# Altium PCB P00160.5.28_P.PcbDoc
Units mm, origin at the board's own origin, x right, y up, seen from the top; angles counter-clockwise.
Board outline 67 x 20.5 mm, 4 copper layers (Top Layer, MID1, MID2, Bottom Layer), stack 0.982 mm thick; 78 components, 49 nets, 312 pads, 209 vias.
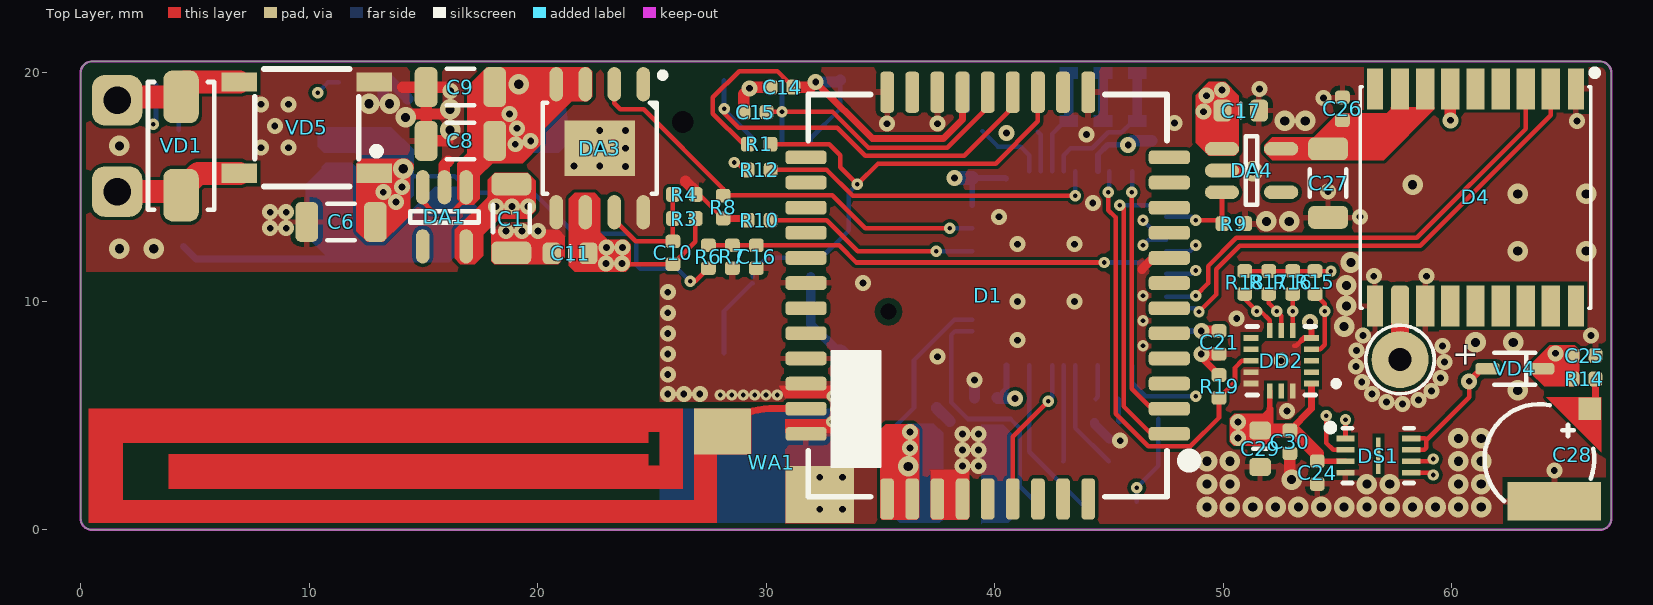
[diagram p0: Top Layer view]
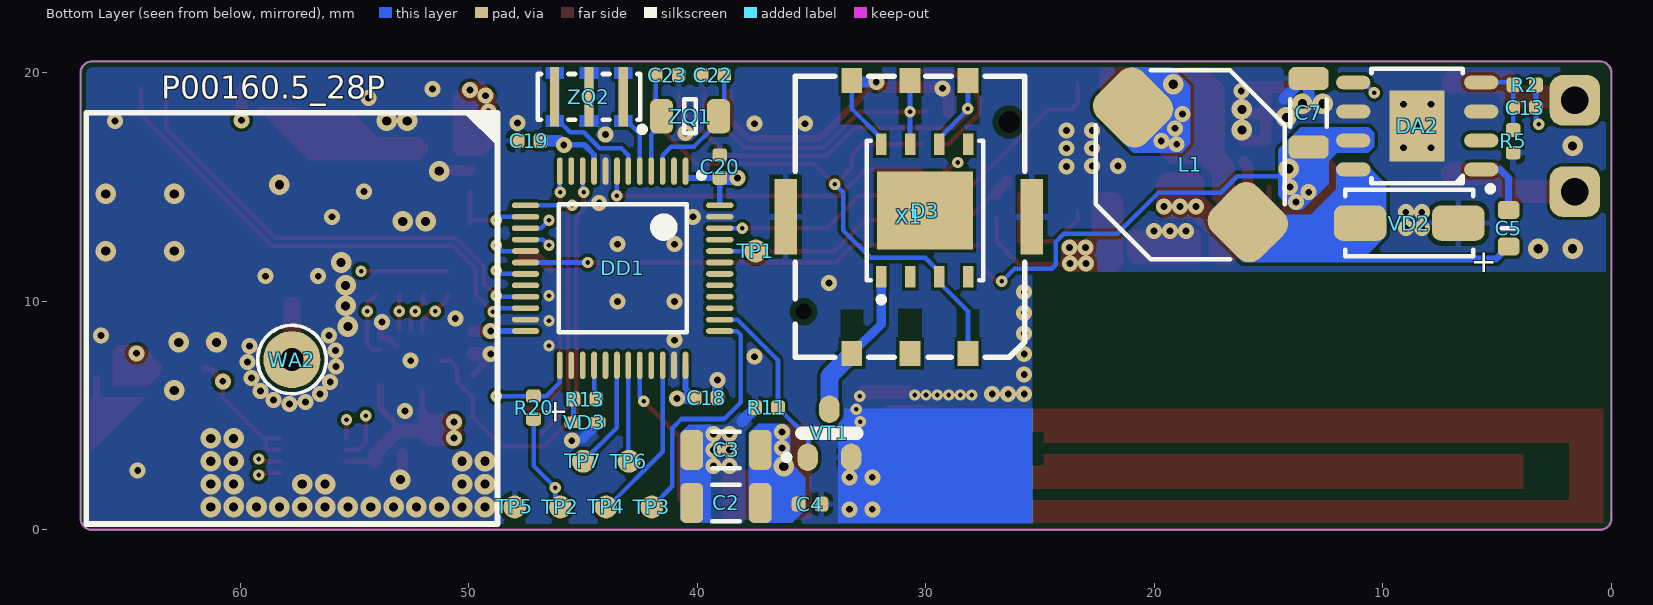
[diagram p1: Bottom Layer view, seen from below]
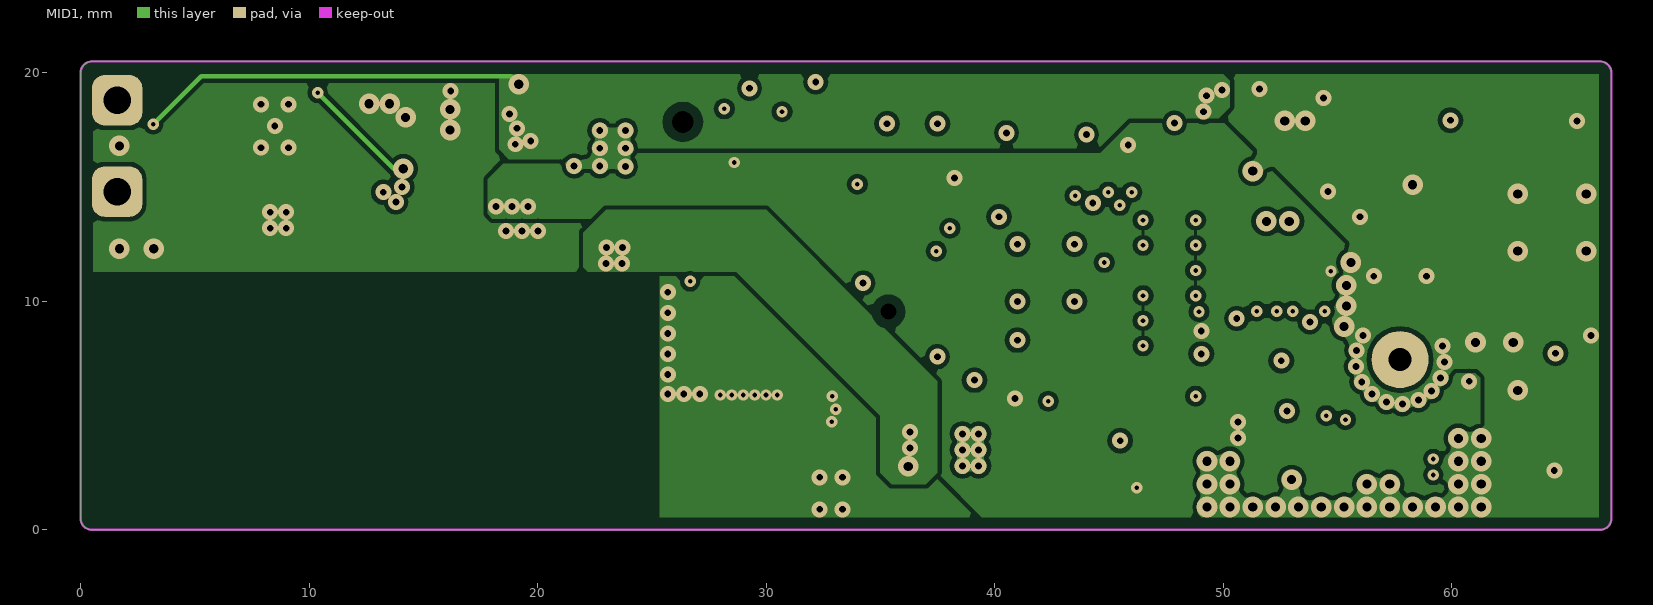
[diagram p2: MID1]
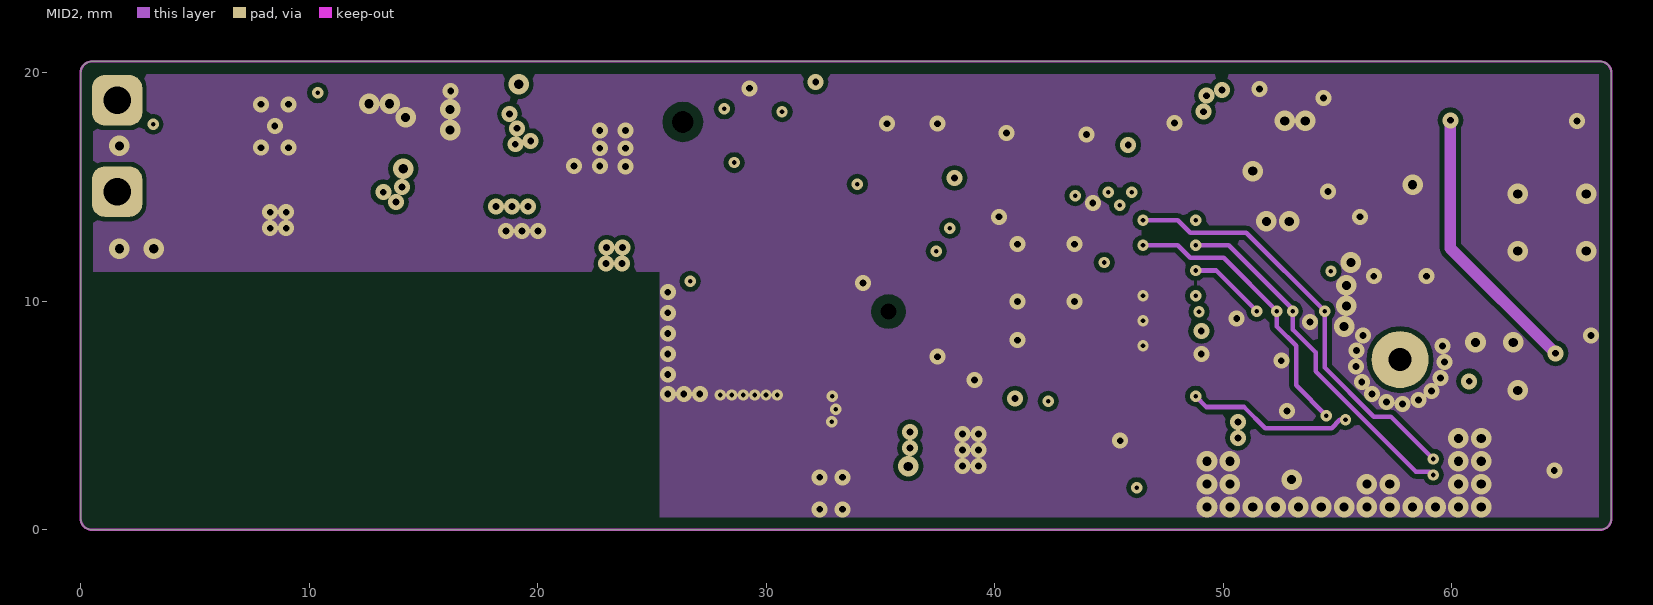
[diagram p3: MID2]
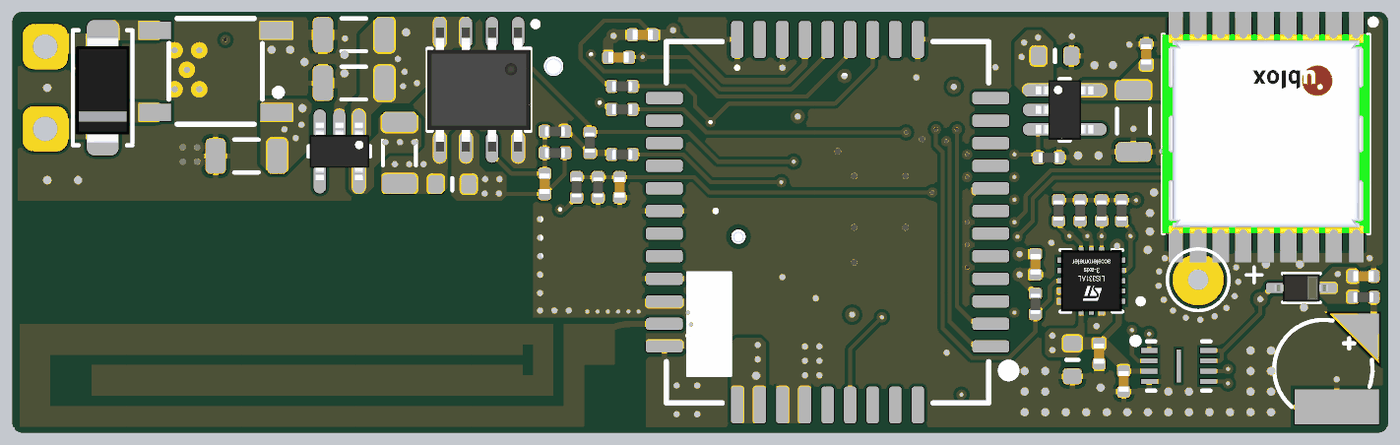
[diagram p4: 3D render of the assembled board from above, using the file's embedded part models]
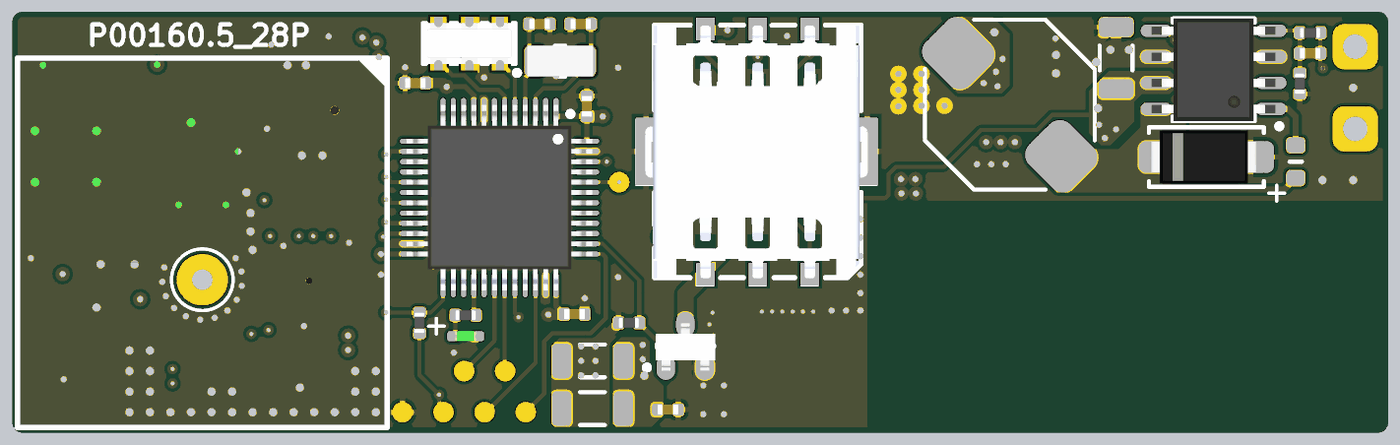
[diagram p5: 3D render of the assembled board from below, using the file's embedded part models]

## Layer stack, top to bottom
Top Solder: solder mask 0.02, Solder Resist, Dk 3.5
Top Layer: signal copper 0.018
Dielectric 1: prepreg 0.2, Prepreg 7628, Dk 4.6
MID1: signal copper 0.018
Dielectric 3: core 0.51, Dk 4.2
MID2: signal copper 0.018
Dielectric 2: prepreg 0.2, Prepreg 7628, Dk 4.2
Bottom Layer: signal copper 0.018
Bottom Solder: solder mask 0.02, Solder Resist, Dk 3.5

## Board outline
0,0.5 ccw(c0.5,0.5) 0.5,0 66.5,0 ccw(c66.5,0.5) 67,0.5 67,20 ccw(c66.5,20) 66.5,20.5 0.5,20.5 ccw(c0.5,20) 0,20

## Design rules (kind name [scope] priority, off if disabled: settings)
Clearance NonPlated_MID [(ObjectKind = 'Pad') And (Net = 'No Net') vs IsElectrical  And OnMid] p1: gap=0.4
Clearance Non_plated [(ObjectKind = 'Pad') And (Net = 'No Net')  And HasRoundHole vs IsElectrical  And (OnTOP Or OnBottom)] p2: gap=0.25
Clearance KeepOut_MID [(IsKeepOut And (Layer = 'KeepOutLayer')) vs (IsElectrical and OnMid) or IsVia] p3: gap=0.5
Clearance KeepOut [IsKeepOut] p4: gap=0.2
Clearance Top&Bot [OnTop Or OnBottom] p5: gap=0.15
Clearance All [All] p6: gap=0.2
ComponentClearance [All] p1 off: gap=0.1 collisioncheckmode=3 verticalgap=0.1 showdistances=FALSE
PlaneConnect [All] p1: planeconnectstyle=Direct reliefexpansion=0.508 reliefentries=4 reliefconductorwidth=0.254 reliefairgap=0.254
PolygonConnect Direct [(Component = 'DD1') Or (Component = 'DA2') Or (Component = 'VD5')   Or (Component = 'DA3')Or (Component = 'WA1')   Or (Component = 'DD2')] p1: connectstyle=Direct reliefconductorwidth=0.254 reliefentries=4 polygonreliefangle="90 Angle" airgapwidth=0.254
PolygonConnect GND_VIAS [InNet('GND') or InNet('4V0') or InNet('3V3MCU')  or InNet('4V5') vs IsVia] p2: connectstyle=Direct reliefconductorwidth=0.254 reliefentries=4 polygonreliefangle="90 Angle" airgapwidth=0.254
PolygonConnect [All] p3: connectstyle=Relief reliefconductorwidth=0.25 reliefentries=4 polygonreliefangle="90 Angle" airgapwidth=0.2
RoutingVias [All] p1: holewidth=0.3 width=0.3 viastyle="Through Hole" minholewidth=0.2 minwidth=0.5 maxholewidth=1 maxwidth=2
SolderMaskExpansion [All] p1: expansion=0.05
Width RF [InNetClass('RF')] p1 off: maxlimit=1.091 minlimit=0.254 preferedwidth=1.091 toplayer_minwidth=0.283 toplayer_maxwidth=0.283 toplayer_prefwidth=0.283 midlayer1_minwidth=0.758 midlayer1_maxwidth=0.758 midlayer1_prefwidth=0.758 midlayer2_maxwidth=0.254 midlayer2_prefwidth=0.254 bottomlayer_minwidth=1.091 impedancedriven=TRUE minimp=50.000000 maximp=50.000000 favimp=50.000000
Width All_Width [All] p2: maxlimit=2 minlimit=0.15 preferedwidth=0.2 minimp=50.000000 maximp=50.000000 favimp=50.000000
28 further rules are at their usual default settings.

## Classes and differential pairs
net class RF: GPS_ANT GSM_ANT

## Components (designator, comment, footprint, x,y, rotation, side; value= is the part's Value field where it differs from the comment)
C1 "чип 1206 100uF/6.3V," CAPC3216X135(1206) 18.85,13.625 r270 top
C2 "чип 1206 100uF/6.3V," CAPC3216X135(1206) 38.75,1.175 r0 bottom
C3 "чип 1206 100uF/6.3V," CAPC3216X135(1206) 38.75,3.5 r0 bottom
C4 "чип 0402 0.1uF/10V," CAPC1005X50(0402) 35.075,1.125 r0 bottom
C5 "чип 0603 0.1uF/50V," CAPC1608X50(0603) 4.5,13.2 r90 bottom
C6 "чип 1206 10uF/50V," CAPC3216X135(1206) 11.4,13.475 r180 top
C7 "чип 1206 10uF/50V," CAPC3216X135(1206) 13.25,18.25 r90 bottom
C8 "чип 1206 100uF/6.3V," CAPC3216X135(1206) 16.625,17.025 r180 top
C9 "чип 1206 100uF/6.3V," CAPC3216X135(1206) 16.625,19.375 r180 top
C10 "чип 0402 */," CAPC1005X50(0402) 25.925,12.125 r90 top
C11 "чип 0603 10uF/6.3V," CAPC1608X50(0603) 21.425,12.1 r0 top
C13 "чип 0402 150pF/50V," CAPC1005X50(0402) 3.8,18.475 r0 bottom
C14 "чип 0402 0.1uF/10V," CAPC1005X50(0402) 30.7,19.375 r0 top
C15 "чип 0402 10nF/10V," CAPC1005X50(0402) 29.525,18.275 r0 top
C16 "чип 0402 0.1uF/10V," CAPC1005X50(0402) 29.575,11.95 r90 top
C17 "чип 0603 10uF/6.3V," CAPC1608X50(0603) 50.775,18.35 r180 top
C18 "чип 0402 0.1uF/10V," CAPC1005X50(0402) 39.625,5.775 r0 bottom
C19 "чип 0402 0.1uF/10V," CAPC1005X50(0402) 47.375,17.025 r180 bottom
C20 "чип 0402 0.1uF/10V," CAPC1005X50(0402) 39.025,15.9 r270 bottom
C21 "чип 0402 0.1uF/10V," CAPC1005X50(0402) 49.825,8.2 r90 top
C22 "чип 0402 10pF/10V," CAPC1005X50(0402) 39.325,19.9 r0 bottom
C23 "чип 0402 10pF/10V," CAPC1005X50(0402) 41.325,19.9 r180 bottom
C24 "чип 0402 0.1uF/10V," CAPC1005X50(0402) 54.125,2.5 r90 top
C25 "чип 0402 0.1uF/10V," CAPC1005X50(0402) 65.8,7.625 r180 top
C26 "чип 0402 0.1uF/10V," CAPC1005X50(0402) 55.225,18.425 r270 top
C27 "чип 1206 100uF/6.3V," CAPC3216X135(1206) 54.6,15.175 r270 top
C28 "Coin 80mF/3.3В" XH414HG-IV01E 63.85,3.1 r0 top
C29 "чип 0603 10uF/6.3V," CAPC1608X50(0603) 51.625,3.55 r90 top
C30 "чип 0402 0.1uF/10V," CAPC1005X50(0402) 52.925,3.85 r90 top
D1 "SIM800C" SIMCOM800C 39.7,10.25 r180 top locked
D3 "SIMCHIP" VQFN127P600-8N 30.05,13.975 r90 bottom locked
D4 "MAX-M8C" MAX-7 61.05,14.55 r270 top locked
DA1 "TPS76333DBV(SOT23-5)" SOT95P285X130-5N(SOT23-5) 15.925,13.7 r270 top
DA2 "ST1S14PHR(HSOP-8)" HSOP127P-8N 8.5,17.675 r0 bottom
DA3 "RT9025-18GSP(HSOP-8)" HSOP127P-8N 22.725,16.7 r270 top
DA4 "TPS76333DBV(SOT23-5)" SOT95P285X130-5N(SOT23-5) 51.25,15.725 r0 top
DD1 "STM32L151CBT6(LQFP-48)" TSQFP50P900X900X160-48N 43.275,11.45 r270 bottom locked
DD2 "LIS331DLH(LGA-16 (3x5x1))" LGA16S50P3X5_300X300X100 52.55,7.4 r180 top
DS1 "MX25L1006EZUI-10G(USON-8)" SON50P300X60_HS-9N 56.8,3.25 r0 top locked
L1 "CDRH8D28NP-100NC(10uH)" CDRH8D28NP 18.425,15.975 r45 bottom locked
R1 "чип 0402 4.75k 1%" RESC1005X35(0402) 29.7,16.875 r0 top
R2 "чип 0402 6.8k 1%" RESC1005X35(0402) 3.8,19.475 r180 bottom
R3 "чип 0402 19.1k 1%" RESC1005X35(0402) 26.425,13.625 r0 top
R4 "чип 0402 4.75k 1%" RESC1005X35(0402) 26.425,14.675 r0 top
R5 "чип 0402 2.49k 1%" RESC1005X35(0402) 4.3,17 r270 bottom
R6 "чип 0402 102k 1%" RESC1005X35(0402) 27.475,11.95 r90 top
R7 "чип 0402 6.8k 1%" RESC1005X35(0402) 28.525,11.95 r270 top
R8 "чип 0402 102k 1%" RESC1005X35(0402) 28.125,14.125 r90 top
R9 "чип 0402 102k 1%" RESC1005X35(0402) 50.475,13.4 r0 top
R10 "чип 0402 10k 5%" RESC1005X35(0402) 29.7,13.55 r0 top
R11 "чип 0402 102k 1%" RESC1005X35(0402) 36.975,5.35 r0 bottom
R12 "чип 0402 10k 5%" RESC1005X35(0402) 29.7,15.75 r0 top
R13 "чип 0402 1k 5%" RESC1005X35(0402) 44.925,5.725 r0 bottom
R14 "чип 0402 10R 5%" RESC1005X35(0402) 65.8,6.6 r180 top
R15 "чип 0402 19.1k 1%" RESC1005X35(0402) 54.025,10.825 r90 top
R16 "чип 0402 19.1k 1%" RESC1005X35(0402) 53.05,10.825 r90 top
R17 "чип 0402 19.1k 1%" RESC1005X35(0402) 52,10.825 r90 top
R18 "чип 0402 19.1k 1%" RESC1005X35(0402) 50.95,10.825 r90 top
R19 "чип 0402 10k 5%" RESC1005X35(0402) 49.825,6.275 r90 top
R20 "чип 0402 10k 5%" RESC1005X35(0402) 47.175,5.35 r270 bottom
TP1 "BOOT0" TEST_POINT 37.45,12.2 r180 bottom
TP2 "3V3" TEST_POINT 46,1 r90 bottom locked
TP3 "SWCLK" TEST_POINT 42,1 r90 bottom locked
TP4 "SWDIO" TEST_POINT 44,1 r90 bottom locked
TP5 "GND" TEST_POINT 48,1 r90 bottom locked
TP6 "UART1_RX" TEST_POINT 43,3 r90 bottom locked
TP7 "UART1_TX" TEST_POINT 45,3 r90 bottom locked
VD1 "SMAJ48CA (SMA)" "DIOM5226X267N (SMA) B" 4.4,16.8 r90 top locked
VD2 "B340A (SMA)" "DIOM5226X267N (SMA)" 8.85,13.425 r180 bottom
VD3 "APHHS1005SURCK (чип 0402)" LED1005X50N(0402)_GREEN 44.925,4.7 r0 bottom
VD4 "BAT54WS (SOD323)" SOD2514X110N(SOD323) 62.775,7.05 r180 top
VD5 "MDB6S (MicroDIP)" Micro-DIP 9.9,17.6 r180 top locked
VT1 "IRLML0030TRPBF (SOT-23)" "SOT95P230-3N (SOT-23) num" 34.225,4.225 r90 bottom
WA1 "" PCB_ANT 27.85,0.3 r90 top locked
WA2 "UDA182-180-1575-C-GPS-GLONASS-PCB" UDA182 57.75,9.25 r180 bottom locked
X1 "MUP Connectors MUP-C781" MUP-C781 30.7,13.7 r0 bottom locked
ZQ1 "DST310S(32.768 KHz)" XTAL320X150X90-2N(DST) 40.325,18.1 r0 bottom
ZQ2 "CSTCR4M00G15C99-R0(4 MHz)" "XTAL450X200X120 (CSTCR)" 44.75,18.95 r0 bottom

## Footprints (in the part's own frame and the unit in brackets; to place one, negate y for a bottom-side part, rotate by r counter-clockwise, add the part's x,y. Pads: shape width x height; smd on the part's side, far side on the other; paste and mask are expansions set on the pad)
CAPC1005X50(0402) [mm]
  rrect50% 0.6x0.65 smd paste-0.025: 1(-0.5,0) 2(0.5,0)
  body extent -0.5,-0.25 0.5,0.25, height 0.6
CAPC1608X50(0603) [mm]
  rrect50% 0.8x0.95 smd paste-0.025: 1(-0.8,0) 2(0.8,0)
  silkscreen extent 0,-0.3 0,0.3, body extent -0.8,-0.4 0.8,0.4, height 0.5
CAPC3216X135(1206) [mm]
  rrect50% 1x1.75 smd paste-0.025: 1(-1.5,0) 2(1.5,0)
  silkscreen extent -0.6,-0.8 0.6,0.8, body extent -1.6,-0.8 1.6,0.8, height 1.35
CDRH8D28NP [mm] "CDRH8D28NP"
  rrect50% 3x2.8 smd: 1(-3.55,0) 2(3.55,0)
  silkscreen extent -4.15,-4.15 4.15,4.15, body extent -4.12,-4.15 4.18,4.15, height 2.8
"DIOM5226X267N (SMA)" [mm]
  rrect50% 2.3x1.55 smd: A(2.15,0) C(-2.15,0)
  silkscreen extent -2.8,-1.45 2.8,1.45, body extent -2.73,-1.3 2.47,1.3, height 2.4
"DIOM5226X267N (SMA) B" [mm] "for Bidirectional"
  rrect50% 2.3x1.55 smd: 1(-2.15,0) 2(2.15,0)
  silkscreen extent -2.8,-1.45 2.8,1.45, body extent -2.73,-1.3 2.47,1.3, height 2.4
HSOP127P-8N [mm] "HSOP 1.27 mm pitch. 8 leads. Body 4x5mm. Exposed Pad."
  oval 1.5x0.6 smd: 1(-2.8,1.905) 2(-2.8,0.635) 3(-2.8,-0.635) 4(-2.8,-1.905) 5(2.8,-1.905) 6(2.8,-0.635) 7(2.8,0.635) 8(2.8,1.905)
  rect 2.41x3.1 smd: 9(0,0)
  silkscreen extent -3.32,-2.5 2,2.87, body extent -3.02,-2.51 3.02,2.51, height 1.63
LED1005X50N(0402)_GREEN [mm]
  rrect60% 0.7x0.5 smd: A(0.55,0) C(-0.55,0)
  body extent -0.5,-0.25 0.51,0.25, height 0.45
LGA16S50P3X5_300X300X100 [mm] "LGA, 16-Leads, Body 3.0x3.0mm (max), Pitch 0.50mm, IPC Medium Density"
  rect 0.65x0.25 smd: 1(-1.325,1) 2(-1.325,0.5) 3(-1.325,0) 4(-1.325,-0.5) 5(-1.325,-1) 9(1.325,-1) 10(1.325,-0.5) 11(1.325,0) 12(1.325,0.5) 13(1.325,1)
  rect 0.25x0.65 smd: 6(-0.5,-1.325) 7(0,-1.325) 8(0.5,-1.325) 14(0.5,1.325) 15(0,1.325) 16(-0.5,1.325)
  silkscreen extent -2.53,-1.5 1.5,1.5, body extent -1.5,-1.5 1.5,1.5, height 1.01
MAX-7 [mm]
  rect 1.8x0.7 smd paste-2: 1(-4.75,4.4) 9(-4.75,-4.4) 10(4.75,-4.4) 18(4.75,4.4)
  rect 1.8x0.8 smd paste-2: 2(-4.75,3.3) 3(-4.75,2.2) 4(-4.75,1.1) 5(-4.75,0) 6(-4.75,-1.1) 7(-4.75,-2.2) 8(-4.75,-3.3) 12(4.75,-2.2) 13(4.75,-1.1) 14(4.75,0) 15(4.75,1.1) 16(4.75,2.2) 17(4.75,3.3)
  rrect50% 1.8x0.8 smd paste-2: 11(4.75,-3.3)
  silkscreen extent -5.47,-5.05 4.85,5.25, body extent -4.85,-5.05 4.85,5.05, height 2.48
Micro-DIP [mm]
  rect 1.55x0.85 smd: 1(-2.95,2) 2(-2.95,-2) 3(2.95,-2) 4(2.95,2)
  silkscreen extent -3.12,-2.58 2.27,2.58
MUP-C781 [mm]
  rect 0.9x1.1 smd: 1(2.54,-5.97) 2(0,-5.97) 3(-2.54,-5.97) 5(2.54,5.98) 6(0,5.98) 7(-2.54,5.98)
  rect 1x3.29 smd: 4(5.44,0) 8(-5.33,0)
  round 0 hole 0.95 unplated mask+0.5: MH1(-4.34,-4.15)
  round 0 hole 0.7 unplated mask+0.4: MH2(4.66,4.15)
  silkscreen extent -5.02,-6.15 5.02,6.15, body extent -5.84,-6.52 5.96,6.57, height 1.36
PCB_ANT [mm]
  rect 2x2.5 smd paste-100 mask-100: 1(4,-0.25)
  rect 2.5x3 smd paste-100 mask-100: 2(1.25,-4.5)
  Top Layer region: 0,0 0,27.5 5,27.5 5,1.5 1.5,1.5 1.5,24 3,24 3,3 2.5,3 2.5,2.5 4,2.5 4,3 3.5,3 3.5,26 1,26 1,1 5,1 5,-1.5 3,-1.5 3,0
  Bottom Layer region: 5,-5.45 5,2.5 0,2.5 0,-6 4.325,-6 4.6,-5.725 5,-5.725
RESC1005X35(0402) [mm]
  rrect50% 0.6x0.65 smd paste-0.025: 1(-0.5,0) 2(0.5,0)
  body extent -0.5,-0.25 0.5,0.25, height 0.38
SIMCOM800C [mm]
  rrect50% 1.8x0.6 smd: 1(-7.95,6.05) 2(-7.95,4.95) 3(-7.95,3.85) 4(-7.95,2.75) 5(-7.95,1.65) 6(-7.95,0.55) 7(-7.95,-0.55) 8(-7.95,-1.65) 9(-7.95,-2.75) 10(-7.95,-3.85) 11(-7.95,-4.95) 12(-7.95,-6.05) 22(7.95,-6.05) 23(7.95,-4.95) 24(7.95,-3.85) 25(7.95,-2.75) 26(7.95,-1.65) 27(7.95,-0.55) 28(7.95,0.55) 29(7.95,1.65) 30(7.95,2.75) 31(7.95,3.85) 32(7.95,4.95) 33(7.95,6.05)
  rrect50% 0.6x1.8 smd: 13(-4.4,-8.9) 14(-3.3,-8.9) 15(-2.2,-8.9) 16(-1.1,-8.9) 17(0,-8.9) 18(1.1,-8.9) 19(2.2,-8.9) 20(3.3,-8.9) 21(4.4,-8.9) 34(4.4,8.9) 35(3.3,8.9) 36(2.2,8.9) 37(1.1,8.9) 38(0,8.9) 39(-1.1,8.9) 40(-2.2,8.9) 41(-3.3,8.9) 42(-4.4,8.9)
  silkscreen extent -8.85,-8.8 7.85,8.8, body extent -7.85,-8.8 7.85,8.8, height 2.35
SOD2514X110N(SOD323) [mm]
  rrect50% 1.05x0.5 smd: A(1.2,0) C(-1.2,0)
  silkscreen extent -0.9,-0.7 0.9,0.7, body extent -1.3,-0.67 1.3,0.68, height 1.1
SON50P300X60_HS-9N [mm] "SON, 8-Leads, Body 2.00x3.00mm, Pitch 0.50mm, Thermal Pad 1.60x0.20mm, IPC Medium Density"
  rect 0.8x0.25 smd: 1(-1.44,0.75) 2(-1.44,0.25) 3(-1.44,-0.25) 4(-1.44,-0.75) 5(1.44,-0.75) 6(1.44,-0.25) 7(1.44,0.25) 8(1.44,0.75)
  rect 0.2x1.6 smd: 9(0,0)
  silkscreen extent -2.25,-1.2 1.55,1.37, body extent -1.55,-1.05 1.55,1.05, height 0.6
"SOT95P230-3N (SOT-23) num" [mm]
  oval 1.2x0.9 smd: 1(-1.05,0.95) 2(-1.05,-0.95) 3(1.05,0)
  silkscreen extent -1.17,-1.2 0,2, body extent -1.2,-1.45 1.1,1.45, height 1
SOT95P285X130-5N(SOT23-5) [mm]
  oval 1.5x0.6 smd: 1(-1.295,0.95) 2(-1.295,0) 3(-1.295,-0.95) 4(1.295,-0.95) 5(1.295,0.95)
  silkscreen extent -0.25,-1.5 0.25,1.5, body extent -1.4,-1.45 1.4,1.45, height 1.45
TEST_POINT [mm]
  round 1 smd paste-1: 1(0,0)
TSQFP50P900X900X160-48N [mm] "TSQFP, 48-Leads, Body 9.2x9.2mm (max), Pitch 0.50mm, IPC Medium Density"
  oval 1.2x0.25 smd: 1(-4.25,2.75) 2(-4.25,2.25) 3(-4.25,1.75) 4(-4.25,1.25) 5(-4.25,0.75) 6(-4.25,0.25) 7(-4.25,-0.25) 8(-4.25,-0.75) 9(-4.25,-1.25) 10(-4.25,-1.75) 11(-4.25,-2.25) 12(-4.25,-2.75) 25(4.25,-2.75) 26(4.25,-2.25) 27(4.25,-1.75) 28(4.25,-1.25) 29(4.25,-0.75) 30(4.25,-0.25) 31(4.25,0.25) 32(4.25,0.75) 33(4.25,1.25) 34(4.25,1.75) 35(4.25,2.25) 36(4.25,2.75)
  oval 0.25x1.2 smd: 13(-2.75,-4.25) 14(-2.25,-4.25) 15(-1.75,-4.25) 16(-1.25,-4.25) 17(-0.75,-4.25) 18(-0.25,-4.25) 19(0.25,-4.25) 20(0.75,-4.25) 21(1.25,-4.25) 22(1.75,-4.25) 23(2.25,-4.25) 24(2.75,-4.25) 37(2.75,4.25) 38(2.25,4.25) 39(1.75,4.25) 40(1.25,4.25) 41(0.75,4.25) 42(0.25,4.25) 43(-0.25,4.25) 44(-0.75,4.25) 45(-1.25,4.25) 46(-1.75,4.25) 47(-2.25,4.25) 48(-2.75,4.25)
  silkscreen extent -4.2,-2.8 2.8,3.57, body extent -4.51,-4.51 4.51,4.51, height 1.75
UDA182 [mm] "GPS Ceramic Patch Antenna CiROSTAR® Series 18x18x2mm"
  round 2.5 hole 1: 1(0,-1.8)
  silkscreen extent -9,-9 9,9, body extent -9,-9 9,9, height 2.17
VQFN127P600-8N [mm]
  rect 0.925x0.45 smd: 1(-2.9,1.905) 2(-2.9,0.635) 3(-2.9,-0.635) 4(-2.9,-1.905) 5(2.9,-1.905) 6(2.9,-0.635) 7(2.9,0.635) 8(2.9,1.905)
  rect 3.4x4.2 smd: 9(0,0)
  silkscreen extent -4.02,-2.55 3.05,2.55, body extent -3.05,-2.55 3.05,2.55, height 0.9
XH414HG-IV01E [mm]
  rect 1x1 smd: 1(2.2,2.2)
  rect 4.1x1.7 smd: 2(0.65,-1.85)
  Top Layer region: 2.7,2.7 2.7,0.3 0.3,2.7
  silkscreen extent -2.4,-1.84 2.4,2.4, body extent -2.4,-2.4 2.4,2.4, height 1.8
XTAL320X150X90-2N(DST) [mm]
  rrect50% 1x1.5 smd paste-0.025 mask+0.1: 1(-1.25,0) 2(1.25,0)
  silkscreen extent -0.25,-0.75 0.25,0.75, body extent -1.6,-0.75 1.6,0.75, height 0.9
"XTAL450X200X120 (CSTCR)" [mm] "Ceramic Resonators CSTCR_G15C"
  rect 0.4x2.6 smd: 1(-1.5,0) 2(0,0) 3(1.5,0)
  Top Layer region: 1.1,1.3 1.1,0.8 1.3,0.8 1.3,-0.8 1.1,-0.8 1.1,-1.3 1.9,-1.3 1.9,-0.8 1.7,-0.8 1.7,0.8 1.9,0.8 1.9,1.3
  Top Layer region: -0.4,1.3 -0.4,0.8 -0.2,0.8 -0.2,-0.8 -0.4,-0.8 -0.4,-1.3 0.4,-1.3 0.4,-0.8 0.2,-0.8 0.2,0.8 0.4,0.8 0.4,1.3
  Top Layer region: -1.9,1.3 -1.9,0.8 -1.7,0.8 -1.7,-0.8 -1.9,-0.8 -1.9,-1.3 -1.1,-1.3 -1.1,-0.8 -1.3,-0.8 -1.3,0.8 -1.1,0.8 -1.1,1.3
  silkscreen extent -2.37,-1 2.25,1.47, body extent -2.25,-1 2.25,1, height 1.15

## Part data
C1 C2 C3 C6 C7 C8 C9 C27: library part C1206, "C1206"
C4 C10 C13 C14 C15 C16 C18 C19 C20 C21 C22 C23 C24 C25 C26 C30: library part C0402, "C0402"
C5 C11 C17 C29: library part C0603, "C0603"
C28: library part XH414HG-IV01E, "ELECTRIC DOUBLE LAYER CAPACITORS"
D4: library part MAX-7
DA1 DA4: library part TPS76333DBV, "TPS76333DBV"
DA2: library part ST1S14
DA3: library part RT9025, "2A, Ultra Low Dropout LDO"
DD1: library part STM32L151CxU6, "STM32L151CxU6"
DD2: library part LIS331DLH, "MEMS digital output motion sensor  ultra low-power high performance 3-axes “nano” accelerometer"
DS1: library part MX25L1006E, "1M-BIT [x 1/x 2] CMOS SERIAL FLASH"
L1: library part CDRH8D28NP, "CDRH8D28NP"
R1 R2 R3 R4 R5 R6 R7 R8 R9 R10 R11 R12 R13 R14 R15 R16 R17 R18 R19 R20: library part R0402, "R0402"
TP1 TP2 TP3 TP4 TP5 TP6 TP7: library part TEST_POINT, "TEST_POINT"
VD1: library part "SMA Zener (Bidir)", "Zener (TVS) Diode in SMA package Bidirectional"
VD2: library part "SMA SCHOTTKY", "Schottky diode in SMA Case"
VD3: library part "LED 0402", "LED 0402"
VD4: library part BAT54WS, "BAT54WS"
VD5: library part MDB6S, "B1S-B10S 0.5 surface mount glass passivated bridge rectifier"
VT1: library part IRLML0030, "HEXFET Power MOSFET"
WA1: library part ANT_PCB_CLIP, "CLIP_ANT"
WA2: library part "GPS antenna Pass", "A25, UDA25, A18"
X1: library part "SIM MUP-C781", "Sim Holder MUP-C781"
ZQ1: library part "XTAL, SMD, 3.2mm x 1.5mm, 2 pads", "DST310S"
ZQ2: library part "XTAL, SMD, 4.5mm x 2mm, 3 pads", "CSTCR_G15C Ceramic Resonators"

## Free pads (board coordinates)
  rrect50% 2.2x2.2 hole 1.2: 0(1.6,14.8) 0(1.6,18.8)

## Via types
v1: diameter 0.7, hole 0.3, Top Layer to Bottom Layer, tented both sides, 98 vias
v2: diameter 0.9, hole 0.4, Top Layer to Bottom Layer, tented both sides, 54 vias
v3: diameter 0.5, hole 0.2, Top Layer to Bottom Layer, tented both sides, 45 vias
v4: diameter 0.7, hole 0.3, Top Layer to Bottom Layer, 12 vias

## Nets (pads, with @x,y where several pads share a name; then routed paths per layer and width w, separated by ;. In a path a pad name is that pad's centre, name@x,y a point inside that pad or via, vN(x,y) a via of type N, cw(c..) or ccw(c..) an arc to the next point about the centre after c; other vN are vias at no path point)
3V3GPS: C26.2 C27.1 D4.7 D4.8 DA4.5
3V3MCU: C1.1 C18.2 C19.2 C20.2 C21.2 C24.2 C29.2 C30.2 DA1.5 DD1.1 DD1.9 DD1.24 DD1.36 DD1.48 DD2.1 DD2.14 DS1.3 DS1.7 DS1.8 R12.1 R15.2 R16.2 R17.2 R18.2 R20.2 TP2.1 VD4.A | length 34.3
  Top Layer w0.2: v3@28.7,16.1 29.05,15.75 R12.1 ; R18.2 R17.2 R16.2 R15.2 v3(54.725,11.325) ; DS1.7 58.8,3.5 58.9,3.6 58.9,3.925 ; DS1.8 58.825,4 58.9,3.925 ; v1(60.775,6.5) 60.775,5.8 58.9,3.925
  Top Layer w0.25: 52.05,5.3 DD2.14 ; C24.2 DS1.3
  Top Layer w0.3: 52.05,5.3 52.05,4.4 52.1,4.35 ; C30.2 53.875,5.3 DD2.1@53.875,6.3 ; v1(60.775,6.5) 61.325,7.05 VD4.A
  Top Layer w0.5: v1(49.05,8.7) C21.2
  Top Layer w0.6: 52.1,4.35 C30.2 53.099,4.35 54.125,3.324 C24.2
  Bottom Layer w0.2: TP2.1@46.225,1.225 v3(46.225,1.85) 47.175,2.8 R20.2 ; v1@50.525,4.85 v1(50.65,4.725)
  Bottom Layer w0.25: DD1.48 C20.2 40.475,15.4 DD1.1@40.5,15.375 ; C18.2 40.525,6.175 DD1.36 ; DD1.9 44.525,16.421 44.954,16.85 v1(45.85,16.85) ; DD1.24 v1(49.05,8.7)
  Bottom Layer w0.5: C18.2 40.15,5.75 v1(40.9,5.75) ; v1(45.85,16.85) 46.025,17.025 C19.2
  Bottom Layer w0.6: v1(38.25,15.4) C20.2
  other v1: 50.65,4.025 18.175,14.15 18.875,14.15 19.575,14.15
  other v3: 28.6,16.075
4V0: C2.1 C3.1 C4.2 C10.1 C11.2 D1.34 D1.35 DA3.6 R3.2 | length 4.7
  Top Layer w0.2: v1(23.7,11.65) 23.725,11.625 C10.1 26.9,12.6 26.9,13.625 R3.2
  other v1: 36.3,3.575 36.3,4.275 23,11.65 23.025,12.35 23.725,12.35
  other v2: 36.225,2.775
4V5: C8.1 C9.1 C13.1 C17.2 DA1.1 DA1.3 DA3.3 DA3.4 DA4.1 L1.2 R2.2 | length 21.4
  Top Layer w0.2: DA1.3 14.975,14.375 15.4,13.95 16.3,13.95 16.662,14.313
  MID1 w0.2: v3(3.175,17.75) 5.275,19.85 18.825,19.85 v2(19.175,19.5)
  Bottom Layer w0.2: v3(3.175,17.75) 3.3,17.875 C13.1 R2.2
  other v1: 19.025,16.875 19.7,17.025 19.1,17.575 18.775,18.2 49.15,18.3 49.275,19 49.95,19.25
AC_CS: DD1.19 DD2.8 R18.1 | length 6.9
  Top Layer w0.2: R18.1 50.95,10.1 v3(51.475,9.575) 51.643,9.575 52.05,9.168 DD2.8
  MID2 w0.2: v3(48.8,11.35) 49.7,11.35 v3(51.475,9.575)
  Bottom Layer w0.2: DD1.19 48.65,11.2 v3(48.8,11.35)
AC_INT: DD1.10 DD2.11 R19.1 | length 19.7
  Top Layer w0.2: v3(44.977,14.777) 44.977,13.994 45.3,13.671 45.3,5.084 46.734,3.65 48.566,3.65 49.825,4.909 R19.1 50.525,6.475 50.525,7.1 50.825,7.4 DD2.11
  Bottom Layer w0.2: v3(44.977,14.777) 45.025,14.825 DD1.10
BOOT0: DD1.44 R10.2 TP1.1 | length 9.2
  Top Layer w0.2: R10.2@30.35,13.55 32.666,13.55 34.016,12.2 v3(37.45,12.2)
  Bottom Layer w0.2: v3(37.45,12.2) DD1.44
BOOT1: DD1.20
FLASH_CS: DD1.25 DS1.1 R20.1 | length 11.9
  Top Layer w0.2: DS1.1 v3(55.36,4.815)
  MID2 w0.2: v3(48.8,5.85) 49.275,5.375 50.919,5.375 51.844,4.45 54.753,4.45 55.118,4.815 v3(55.36,4.815)
  Bottom Layer w0.2: DD1.25 46.025,6.45 46.625,5.85 R20.1 v3(48.8,5.85)
GND: C1.2 C2.2 C3.2 C4.1 C6.2 C7.2 C8.2 C9.2 C11.1 C14.1 C15.1 C16.1 C17.1 C18.1 C19.1 C20.1 C21.1 C22.2 C23.2 C24.1 C25.1 C26.1 C27.2 C28.2 C29.1 C30.1 D1.8 D1.13 D1.19 D1.21 D1.27 D1.30 D1.31 D1.33 D1.36 D1.37 D4.1 D4.10 D4.12 DA1.2 DA2.3 DA2.6 DA2.9 DA3.5 DA3.8 DA3.9 DA4.2 DD1.8 DD1.23 DD1.35 DD1.47 DD2.5 DD2.12 DD2.13 DD2.16 DS1.4 R4.2 R5.2 R7.2 R8.1 R9.2 R10.1 R11.2 R19.2 TP5.1 VD2.A VD3.C VD5.2 VT1.2 WA1.2 X1.4 X1.8 ZQ2.2 | length 25.7
  Top Layer w0.2: R4.2 27.075,14.675 R8.1 ; 53.125,8.05 53.2,8.05 53.45,8.3
  Top Layer w0.25: 53.45,8.3 53.55,8.4 DD2.5 v1@53.875,8.875
  Top Layer w0.3: R8.1 29.125,13.625 R10.1 ; v1(49.05,7.7) 49.05,7.55 R19.2
  Top Layer w0.4: 46.45,11.4 46.95,11.9 D1.8
  Top Layer w0.5: 14.1,19.375 C9.2 ; v2@14.325,18.2 15.125,18.2 ; v2@15.825,18.2 15.125,18.2 ; DA1.2 15.925,15.962 16.088,16.125 ; v1@16.025,19.375 C9.2 ; 16.075,17.025 C8.2 15.125,18.2 ; 26.475,15.25 26.925,14.8 R4.2 ; C15.1 29.025,19.075 v1(29.275,19.325) 29.325,19.375 C14.1 ; DA4.2 51.275,15.725 v2(51.3,15.7) ; C30.1 52.925,2.275 v2(53,2.2) ; 15.125,18.2 C9.2
  Top Layer w0.6: v1(49.05,7.7) C21.1
  Bottom Layer w0.4: VD3.C 44.375,4.625 45.025,3.975
  Bottom Layer w0.5: v2@13.25,18.925 C7.2 13.45,19.75 14.325,18.875 ; R11.2 37.475,5.325 38.05,4.75 ; C18.1 v1(39.125,6.55)
  other v1: 32.35,0.9 33.35,0.9 32.35,2.3 33.35,2.3 64.5,2.6 38.6,2.8 39.3,2.8 38.6,3.5 39.3,3.5 45.5,3.9 38.6,4.2 39.3,4.2 52.8,5.2 57.85,5.5 57.15,5.6 58.55,5.675 25.7,5.95 26.4,5.95 27.1,5.95 56.525,5.95 59.125,6.075 56.075,6.475 59.525,6.65 25.7,6.8 55.825,7.15 59.7,7.35 52.55,7.4 37.5,7.575 25.7,7.7 55.85,7.85 59.6,8.05 41,8.3 56.125,8.5 66.1,8.5 25.7,8.6 53.8,9.1 50.6,9.25 25.7,9.5 41,10 43.5,10 25.7,10.4 34.25,10.8 56.6,11.1 58.9,11.1 41,12.5 43.5,12.5 18.625,13.075 19.325,13.075 20.025,13.075 8.3,13.2 9,13.2 40.2,13.7 56,13.7 8.3,13.9 9,13.9 44.3,14.3 54.6,14.8 44.025,17.3 40.525,17.375 35.3,17.775 37.5,17.775 47.875,17.8 65.5,17.9 54.4,18.9 16.2,19.2 51.6,19.3
  other v2: 49.3,1 50.3,1 51.3,1 52.3,1 53.3,1 54.3,1 55.3,1 56.3,1 57.3,1 58.3,1 59.3,1 60.3,1 61.3,1 49.3,2 50.3,2 56.3,2 57.3,2 60.3,2 61.3,2 49.3,3 50.3,3 60.3,3 61.3,3 60.3,4 61.3,4 62.9,6.1 61.05,8.2 62.7,8.2 55.3,8.9 55.4,9.8 55.4,10.7 55.6,11.7 62.9,12.2 65.9,12.2 1.7,12.3 3.2,12.3 51.9,13.5 52.9,13.5 62.9,14.7 65.9,14.7 58.3,15.1 1.7,16.8 16.175,17.5 52.7,17.9 53.6,17.9 14.225,18.05 16.175,18.4 12.625,18.65 13.525,18.65
  other v3: 32.875,4.725 33.05,5.275 32.9,5.85 28,5.9 28.5,5.9 29,5.9 29.5,5.9 30,5.9 30.5,5.9 46.5,8.05 46.5,9.15 46.5,10.25
  other v4: 23.85,15.9 21.6,15.925 22.725,15.925 22.725,16.7 23.85,16.7 7.9,16.725 9.1,16.725 22.725,17.475 23.85,17.475 8.5,17.675 7.9,18.625 9.1,18.625
GPS_ANT: D4.11 WA2.1 | length 2.4
  Top Layer w0.8: WA2.1 D4.11
GPS_BKP: C25.2 D4.6 R14.2 VD4.C | length 13.5
  Top Layer w0.5: v1(59.95,17.925) D4.6
  MID2 w0.5: v1(59.95,17.925) 59.95,12.325 v1(64.55,7.725)
GPS_POWER: DA4.3 DD1.14 R9.1 | length 3.9
  Top Layer w0.2: v3(48.8,13.55) 49.825,13.55 R9.1@49.955,13.42 ; DA4.3 R9.1@49.955,13.42 ; R9.1 R9.1@49.955,13.42
  Bottom Layer w0.2: DD1.14 48.65,13.7 v3(48.8,13.55)
GPS_RX: D4.3 DD1.21 | length 21
  Top Layer w0.2: v3(48.8,10.25) 49.35,10.8 49.35,11.545 50.58,12.775 58.48,12.775 63.25,17.545 D4.3
  Bottom Layer w0.2: DD1.21 48.75,10.2 v3(48.8,10.25)
GPS_TX: D4.2 DD1.22 | length 22.2
  Top Layer w0.2: v3(48.95,9.55) 49.7,10.3 49.7,11.4 50.725,12.425 58.625,12.425 64.35,18.15 D4.2
  Bottom Layer w0.2: DD1.22 48.8,9.7 v3(48.95,9.55)
GSM_ANT: D1.32 WA1.1 | length 4
  Top Layer w0.283: WA1.1 WA1.1@28.356,4.556
  Top Layer w0.305: WA1.1@28.356,4.556 cw(c30.152,2.76) 30.152,5.3 D1.32
GSM_PWR: DA3.2 DD1.46 R8.2 | length 18.7
  Top Layer w0.2: DA3.2 23.36,18.665 23.625,18.4 24.643,18.4 R8.2@28.125,14.918 ; R8.2 R8.2@28.125,14.65 ; R8.2@28.125,14.707 R8.2@28.125,14.65 ; v3(38.05,13.2) 34.35,13.2 32.9,14.65 R8.2@28.125,14.65
  Bottom Layer w0.2: v3(38.05,13.2) DD1.46
GSM_RX: D1.2 DD1.12 | length 11.5
  Top Layer w0.2: v3(46,14.775) 46,6.175 46.875,5.3 D1.2
  Bottom Layer w0.2: v3(46,14.775) 46.025,14.8 DD1.12
GSM_TX: D1.1 DD1.13 | length 12.7
  Top Layer w0.2: v3(45.477,14.201) 45.549,14.201 45.65,14.1 45.65,5.4 D1.1@46.85,4.2
  Bottom Layer w0.2: v3@45.478,14.2 DD1.13
LED_MCU: DD1.28 R13.1 | length 1.5
  Bottom Layer w0.2: R13.1 44.525,5.825 DD1.28
MISO: DD1.16 DD2.7 DS1.2 R17.1 | length 17.6
  Top Layer w0.2: R17.1 52,9.925 v3(52.35,9.575) 52.55,9.375 DD2.7 ; v3(54.525,5) 54.525,3.8 54.825,3.5 DS1.2
  MID2 w0.2: v3(46.5,12.45) 48.022,12.45 48.572,11.9 50.025,11.9 v3(52.35,9.575) 52.35,8.9 53.2,8.05 53.2,6.325 v3(54.525,5)
  Bottom Layer w0.2: v3(46.5,12.45) 46.75,12.7 DD1.16
MOSI: DD1.17 DD2.6 DS1.5 R16.1 | length 19.5
  Top Layer w0.2: DD2.6 v3(53.05,9.575) R16.1 ; DS1.5 59.1,2.5 v3(59.2,2.4)
  MID2 w0.2: v3(48.8,12.45) 50.253,12.45 53.05,9.653 v3(53.05,9.575) 53.05,8.766 54.05,7.766 54.05,6.94 58.44,2.55 59.05,2.55 v3(59.2,2.4)
  Bottom Layer w0.2: DD1.17 48.55,12.2 v3(48.8,12.45)
NetC5_1: C5.1 DA2.8 L1.1 VD2.C | length 6.8
  Bottom Layer w0.3: C5.1 5.05,11.85 11.075,11.85
NetC5_2: C5.2 DA2.1 | length 2.8
  Bottom Layer w0.3: C5.2 4.5,15.4 4.87,15.77 DA2.1
NetC10_2: C10.2 DA3.7 R3.1 R4.1 | length 5.3
  Top Layer w0.2: DA3.7 23.36,13.569 24.304,12.625 C10.2 R3.1 R4.1
NetC13_2: C13.2 DA2.4 R2.1 R5.1 | length 3.4
  Bottom Layer w0.2: R5.1 C13.2 R2.1 4.405,19.58 DA2.4
NetC22_1: C22.1 DD1.3 ZQ1.1 | length 4.7
  Bottom Layer w0.2: ZQ1.1@38.825,18.35 C22.1 ; ZQ1.1@39.475,17.45 40.15,16.775 41.15,16.775 41.525,16.4 DD1.3
NetC23_1: C23.1 DD1.4 ZQ1.2 | length 3.3
  Bottom Layer w0.2: ZQ1.2@41.825,18.35 C23.1 ; ZQ1.2@41.9,17.425 42.025,17.3 DD1.4
NetC28_1: C28.1 R14.1 | length 1.1
  Top Layer w0.3: C28.1@66.3,5.55 R14.1
NetDD1_5: DD1.5 ZQ2.1 | length 2.2
  Bottom Layer w0.2: DD1.5 42.525,17.325 42.95,17.75
NetDD1_6: DD1.6 ZQ2.3 | length 4.2
  Bottom Layer w0.2: DD1.6 43.025,16.4 43.325,16.7 44.274,16.7 44.974,17.4 45.575,17.4 45.95,17.775
NetR13_2: R13.2 VD3.A | length 1
  Bottom Layer w0.2: R13.2 45.425,4.75 VD3.A
NRST: DD1.7 R12.2 | length 14.9
  Top Layer w0.2: R12.2@30.175,15.65 30.275,15.75 32.666,15.75 33.791,14.625 v3(43.525,14.625)
  Bottom Layer w0.2: v3(43.525,14.625) DD1.7
PWRKEY: D1.39 DD1.32 | length 6.6
  Top Layer w0.2: D1.39 40.8,4.075 v3(42.35,5.625)
  Bottom Layer w0.2: v3(42.35,5.625) 42.525,5.8 DD1.32
SCK: DD1.15 DD2.4 DS1.6 R15.1 | length 23.7
  Top Layer w0.2: DD2.4 54.25,7.9 54.45,8.1 v3(54.45,9.575) 54.45,9.9 R15.1 ; DS1.6 59.1,3 v3(59.2,3.1)
  MID2 w0.2: v3(46.5,13.55) 48.022,13.55 48.572,13 51.025,13 v3(54.45,9.575) 54.45,7.106 56.606,4.95 57.35,4.95 v3(59.2,3.1)
  Bottom Layer w0.2: v3(46.5,13.55) 46.85,13.2 DD1.15
SIM_CLK: D1.16 D3.6 X1.3 | length 18.4
  Top Layer w0.2: v3(28.175,18.425) 28.175,18.234 28.809,17.6 33.114,17.6 34.339,16.375 38.675,16.375 40.8,18.5 D1.16
  Bottom Layer w0.2: X1.3 28.16,18.4 29.415,17.145 D3.6
SIM_GND: D3.1 VT1.3 X1.5 | length 6.7
  Bottom Layer w0.4: D3.1 31.955,9.005 X1.5
  Bottom Layer w0.8: X1.5 34.225,6.735 VT1.3
SIM_IO: D1.15 D3.3 R1.2 X1.7 | length 26.1
  Top Layer w0.2: R1.2 32.775,16.875 33.25,16.4 33.25,15.875 v3(34,15.125) 34.9,16.025 40.05,16.025 41.9,17.875 D1.15
  Bottom Layer w0.2: X1.7 28.16,9.56 29.385,10.785 D3.3@29.415,10.785 ; D3.3 29.415,11.29 30.025,11.9 32.425,11.9 33.625,13.1 33.625,14.75 v3(34,15.125)
SIM_ON: DD1.38 R11.1 VT1.1 | length 7.7
  Bottom Layer w0.2: VT1.1@35.1,3.55 35.15,3.6 35.15,4.025 R11.1 36.475,7.425 38.25,9.2 DD1.38
SIM_RST: C15.2 D1.17 D3.7 X1.2 | length 14.5
  Top Layer w0.2: C15.2@30,18.3 v3(30.7,18.3) 32.909,18.3 34.484,16.725 37.935,16.725 39.7,18.49 D1.17
  Bottom Layer w0.2: D3.7 30.7,16.89 v3(30.7,18.3) X1.2
SIM_VDD: C14.2 D1.18 D3.8 R1.1 X1.1 | length 21.6
  Top Layer w0.2: R1.1 29.018,16.875 27.675,18.218 27.675,18.925 28.825,20.075 30.5,20.075 C14.2
  Top Layer w0.3: v1(32.175,19.6) 34.65,17.125 37.769,17.125 38.6,17.956 D1.18
  Top Layer w0.5: C14.2 31.95,19.375 v1(32.175,19.6)
  Bottom Layer w0.2: D3.8 31.955,17.135 33.24,18.42 X1.1
  Bottom Layer w0.5: v1(32.175,19.6) 33.17,19.6 X1.1
SWCLK: DD1.37 TP3.1 | length 11.2
  Bottom Layer w0.2: DD1.37 38.275,8.7 38.1,8.525 38.1,5.575 38.825,4.85 40.7,4.85 41.1,4.45 41.1,1.9 TP3.1
SWDIO: DD1.34 TP4.1 | length 7.3
  Bottom Layer w0.2: DD1.34 41.525,3.414 43.939,1 TP4.1
U_IN1: pad.0@1.6,14.8 VD1.1 VD5.4 | length 5.4
  Top Layer w1: pad.0@1.6,14.8 VD1.1@4.25,14.8 ; VD1.1@4.475,14.925 5.15,15.6 VD5.4
U_IN2: pad.0@1.6,18.8 VD1.2 VD5.3 | length 5.4
  Top Layer w1: pad.0@1.6,18.8 1.75,18.95 VD1.2 ; VD1.2@4.425,19.45 4.575,19.6 VD5.3
U_MAIN: C6.1 C7.1 DA2.5 DA2.7 R6.1 VD5.1 | length 22
  Top Layer w0.2: v3(26.675,10.875) 26.9,10.875 R6.1
  MID1 w0.2: v3(10.375,19.125) 13.7,15.8 v2(14.125,15.8)
  Bottom Layer w0.2: v3(10.375,19.125) 10.83,19.58 DA2.5 ; 14.45,15.475 16.379,15.475 17.104,14.75 19.824,14.75 21.624,12.95 23.974,12.95 24.325,12.599 24.325,11.6 24.5,11.425 26.125,11.425 v3(26.675,10.875)
  other v1: 13.8,14.35 13.25,14.775 14.075,15
U_MAIN_MEAS: C16.2 DD1.18 R6.2 R7.1 | length 20.2
  Top Layer w0.2: R6.2 R7.1 C16.2 ; C16.2@29.7,12.45 33.199,12.45 33.949,11.7 v3(44.8,11.7)
  Bottom Layer w0.2: v3(44.8,11.7) DD1.18
UART1_RX: DD1.31 TP6.1 | length 4.2
  Bottom Layer w0.2: TP6.1 43.025,3.025 DD1.31
UART1_TX: DD1.30 TP7.1 | length 4.8
  Bottom Layer w0.2: DD1.30 43.525,4.475 TP7.1
pads on no net: D1.3 D1.4 D1.5 D1.6 D1.7 D1.9 D1.10 D1.11 D1.12 D1.14 D1.20 D1.22 D1.23 D1.24 D1.25 D1.26 D1.28 D1.29 D1.38 D1.40 D1.41 D1.42 D3.2 D3.4 D3.5 D3.9 D4.4 D4.5 D4.9 D4.13 D4.14 D4.15 D4.16 D4.17 D4.18 DA1.4 DA2.2 DA3.1 DA4.4 DD1.2 DD1.11 DD1.26 DD1.27 DD1.29 DD1.33 DD1.39 DD1.40 DD1.41 DD1.42 DD1.43 DD1.45 DD2.2 DD2.3 DD2.9 DD2.10 DD2.15 DS1.9 X1.6 X1.MH1 X1.MH2

## Polygon pours and split planes (outlines as drawn)
4V0 on MID1 "4V0" (solid, remove dead copper, pour order 0): 22,13 23,14 30,14 37.5,6.5 37.5,3 37.5,2.5 37,2 35.5,2 35,2.5 35,5 28.7,11.3 25.35,11.3 22.2,11.3 22,11.5
4V5 on MID1 "4V5_GPS" (solid, remove dead copper, pour order 2): 50.3,19.25 50.3,19.65 49.45,20.5 19.075,20.5 18.375,19.8 18.325,19.75 18.325,17.975 18.325,16.65 18.9,16.075 18.925,16.05 19.225,16.05 19.35,16.05 20.05,16.05 24.325,16.65 27.1,16.65 44.75,16.65 45.925,17.825 49.625,17.825 50.3,18.5
3V3MCU on MID1 "3V3MCU" (solid, remove dead copper, pour order 1): 17.825,14.6 17.825,15.35 18.5,16.025 23.925,16.025 24.388,16.488 44.638,16.488 45.95,17.8 50.05,17.8 55.525,12.325 55.525,6.85 61.05,6.85 61.25,6.65 61.25,0 40,0 37.5,2.5 37.5,6.5 30,14 23,14 22.625,13.625 18.025,13.625 17.825,13.825 17.825,13.925
GND on MID1 "GND_MID1" (solid, remove dead copper, pour order 8): 0,0.5 ccw(c0.5,0.5) 0.5,0 66.5,0 ccw(c66.5,0.5) 67,0.5 67,20 ccw(c66.5,20) 66.5,20.5 0.5,20.5 ccw(c0.5,20) 0,20
GND on Top Layer "GND_TOP" (solid, remove dead copper, pour order 6): 0,0.5 ccw(c0.5,0.5) 0.5,0 66.5,0 ccw(c66.5,0.5) 67,0.5 67,20 ccw(c66.5,20) 66.5,20.5 0.5,20.5 ccw(c0.5,20) 0,20
GND on MID2 "GND_MID2" (solid, remove dead copper, pour order 10): 0,0.5 ccw(c0.5,0.5) 0.5,0 66.5,0 ccw(c66.5,0.5) 67,0.5 67,20 ccw(c66.5,20) 66.5,20.5 0.5,20.5 ccw(c0.5,20) 0,20
GND on Bottom Layer "GND_BOT" (solid, remove dead copper, pour order 12): 0,0.5 ccw(c0.5,0.5) 0.5,0 66.5,0 ccw(c66.5,0.5) 67,0.5 67,20 ccw(c66.5,20) 66.5,20.5 0.5,20.5 ccw(c0.5,20) 0,20

## Keep-outs
Keep-Out Layer:
  the board outline again, w0.1

## Other copper
Top Layer:
  region net 4V0: 36.6,0.45 36.7,0.55 36.7,4.375 36.45,4.625 35.25,4.625 35,4.375 35,0.525 35.075,0.45
  region net 3V3GPS: 57.35,18.5 57.35,18.4 57.175,18.225 55.025,18.225 53.975,17.175 52.15,17.175 51.8,16.825 51.8,16.525 52.15,16.175 57.025,16.175 59.25,18.4 59.25,18.5
  region net U_MAIN: 12.55,12.6 12.075,13.075 12.075,16.025 12.3,16.25 13.925,16.25 14.325,16.25 14.575,16 14.575,15.775 14.425,15.625 14.425,14.475 14.425,13.775 14.05,13.4 13.25,12.6
  region net GND: 30.85,5.75 32.65,5.75 32.9,6 32.9,6.3 30.6,6.3 30.575,6.275
  region net GND: 32.65,4.85 30.85,4.85 30.85,4.25 30.875,4.225 33.025,4.225
  pour cut-out: 30.85,0 30.85,5.6 25.35,5.6 25.35,11.3 0,11.3 0,0
  region net 4V5: 22.4,20.075 22.225,20.25 17.775,20.25 16.925,19.4 16.925,16.475 16.488,16.038 16.488,14.463 16.725,14.225 17.2,14.225 17.475,14.5 17.475,15.5 18.05,16.05 19.35,16.05 20.212,16.913 20.213,17.463 21.5,18.75 22.2,18.75 22.4,18.95
  region net 3V3MCU: 19.925,15.275 19.575,15.625 18.125,15.625 17.825,15.325 17.825,14.575 17.75,14.5 16.375,13.125 16.375,11.875 16.625,11.625 17.25,11.625 17.625,12 17.625,12.925 18.325,13.625 19.575,13.625 19.925,13.975
  region net 4V5: 49.375,16.375 48.8,16.95 48.8,19.025 49.375,19.6 50.1,19.6 50.7,19 50.7,16.55 50.525,16.375
  region net 3V3MCU: 50.475,3.675 50.3,3.85 50.3,4.875 50.5,5.075 51.75,5.075 51.9,5.225 52.212,4.062 51.825,3.675
  region net GPS_BKP: 64.05,6.275 63.45,6.875 63.45,7.225 64.3,8.075 65.4,8.075 65.6,7.875 65.6,6.35 65.525,6.275
  region net 4V0: 24.075,12.5 23.875,12.7 23.075,12.7 22.75,13.025 22.75,14.5 22.5,14.75 21.625,14.75 21.375,14.5 21.375,11.55 21.625,11.3 23.85,11.3 24.075,11.525
  region net GND: 17.975,13.05 18.075,13.15 18.1,13.125 20.925,13.125 21.2,12.85 21.2,11.925 20.9,11.625 18.1,11.625 17.975,11.75
  region net GND: 38.8,0.45 38.9,0.55 38.9,2.575 38.85,2.625 37.15,2.625 37.2,2.575 37.2,0.525 37.275,0.45
MID2:
  pour cut-out: 25.35,0 25.35,5.3 25.35,11.3 0,11.3 0,0
MID1:
  pour cut-out: 25.35,0 25.35,5.3 25.35,11.3 0,11.3 0,0
Bottom Layer:
  region net 4V0: 35.85,0.3 35.275,0.875 35.275,2.275 35.95,2.95 35.95,4.425 36.175,4.65 37.35,4.65 37.75,4.25 37.75,0.45 37.6,0.3
  region net U_MAIN: 13.6,17.625 14.575,16.65 14.575,14.625 13.95,14 13.525,14 12.375,15.15 12.375,16.125 12,16.5 10.65,16.5 10.375,16.775 10.375,17.375 10.625,17.625
  region net NetC5_1: 10.725,16.075 10.55,15.9 10.55,15.825 9.85,15.125 9.85,12.875 11.025,11.7 16.125,11.7 17.488,13.063 17.488,14.013 16.475,15.025 15.5,15.025 14.275,13.8 13.15,13.8 12.05,14.9 12.05,15.9 11.875,16.075
  pour cut-out: 30.185,9.665 30.185,7.165 31.21,7.165 31.21,9.665
  pour cut-out: 32.73,9.66 32.73,7.16 33.755,7.16 33.755,9.66
  pour cut-out: 27.645,9.665 27.645,7.165 28.67,7.165 28.67,9.665
  pour cut-out: 32.725,20.225 32.725,17.725 33.75,17.725 33.75,20.225
  pour cut-out: 30.185,20.225 30.185,17.725 31.21,17.725 31.21,20.225
  pour cut-out: 27.65,20.225 27.65,17.725 28.675,17.725 28.675,20.225
  pour cut-out: 25.35,0 25.35,11.3 0,11.3 0,0
  region net 4V5: 21.425,17 20.938,16.513 18.812,16.512 18.425,16.9 18.425,19.425 19.25,20.25 21.025,20.25
  region net GND: 39.425,4.6 40.375,4.6 40.75,4.225 40.75,0.45 40.6,0.3 39.475,0.3 39.425,0.25

## Silkscreen, mask and mechanical layers (free items; w line width, h text height)
Top Overlay:
  lines w0.2: 63.275,6.375 63.275,7.75
Bottom Overlay:
  text "P00160.5_28P" at 63.475,18.875 h1
Mechanical 4:
  the board outline again, w0.1

## Text inside footprints (layer, text, board x,y; h text height)
VD1: Mechanical 1 "+" at 6.55,19.5 h1 r90
VD2: Mechanical 1 "+" at 6.15,11.275 h1; Bottom Overlay "+" at 6.15,11.275 h1
VD3: Mechanical 1 "+" at 45.625,5.575 h1 r180; Bottom Overlay "+" at 45.625,5.575 h1 r180
VD4: Top Overlay "+" at 61.2,8.075 h1 r180; Mechanical 1 "+" at 61.2,8.075 h1 r180
VD5: Mechanical 1 "~" at 8.725,20.45 h1 r180; Mechanical 1 "~" at 8.725,16.45 h1 r180; Mechanical 1 "-" at 11.75,19.975 h1 r180; Mechanical 1 "+" at 11.75,16.225 h1 r180